# EAGLE board breakout1 (EAGLE 6.6.0)
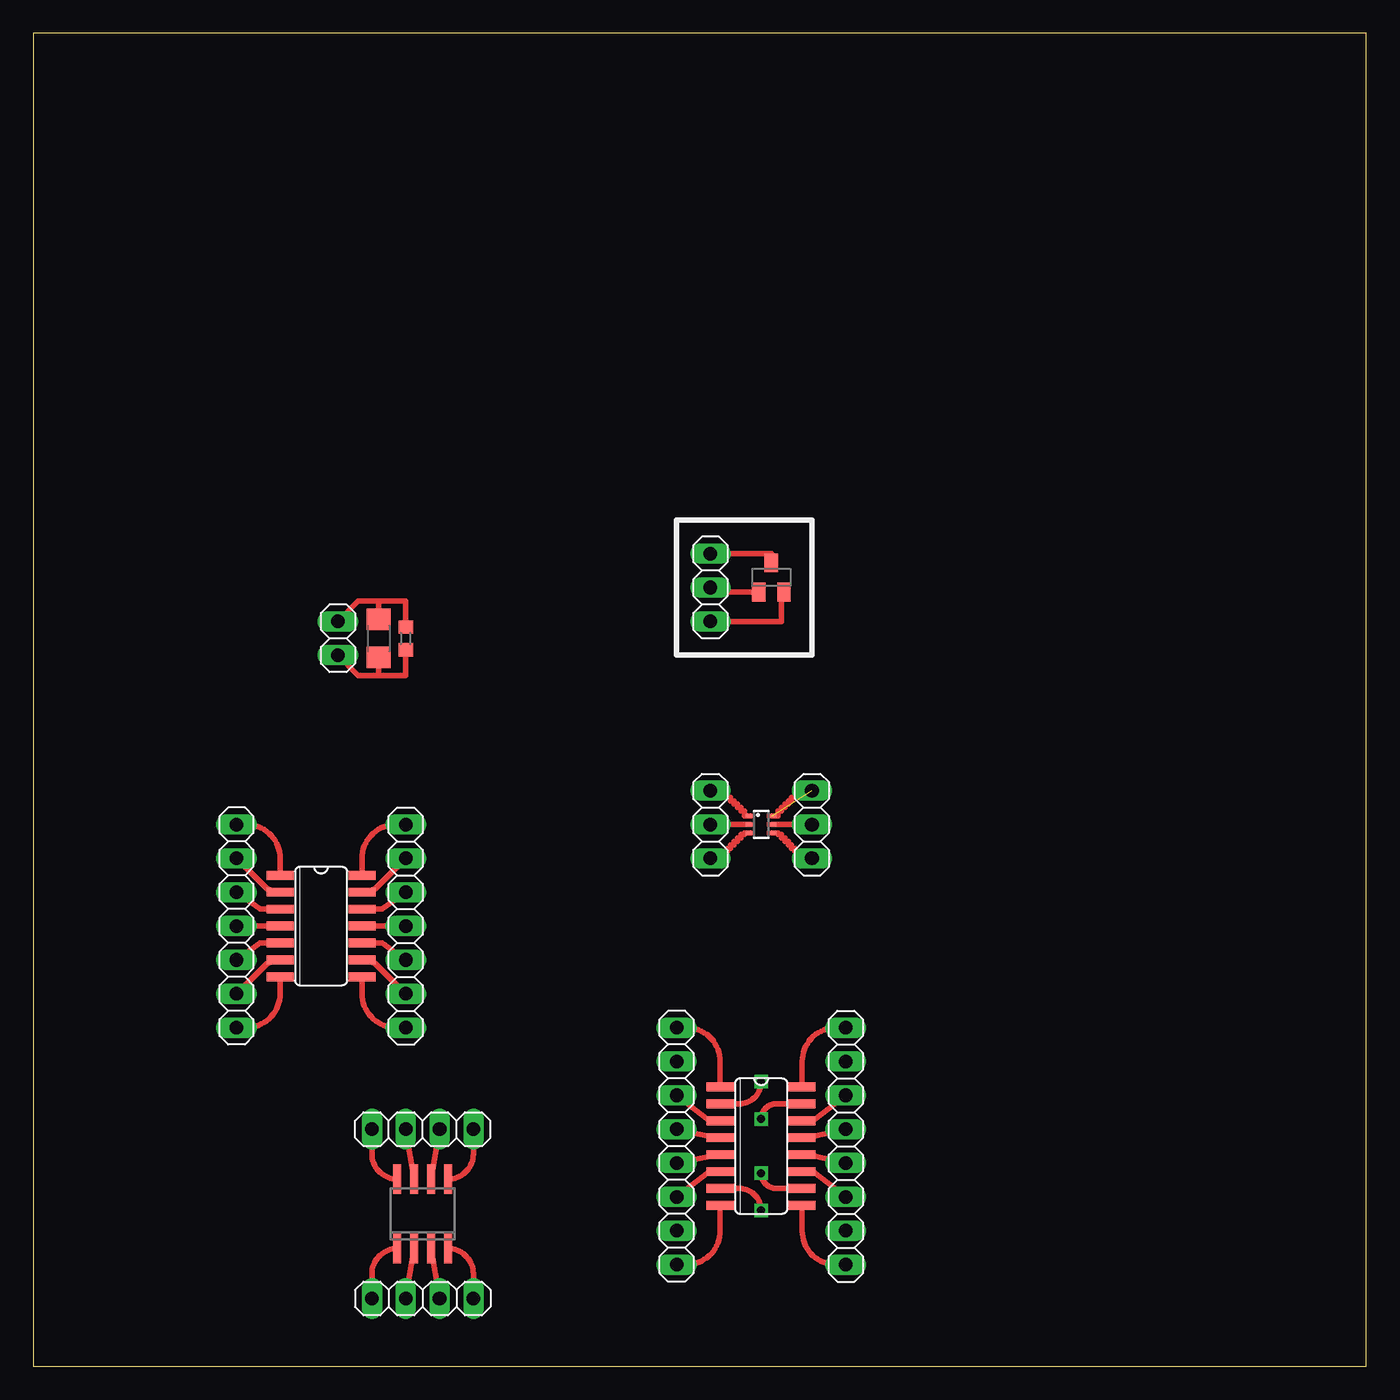
[diagram p0: board, top side]
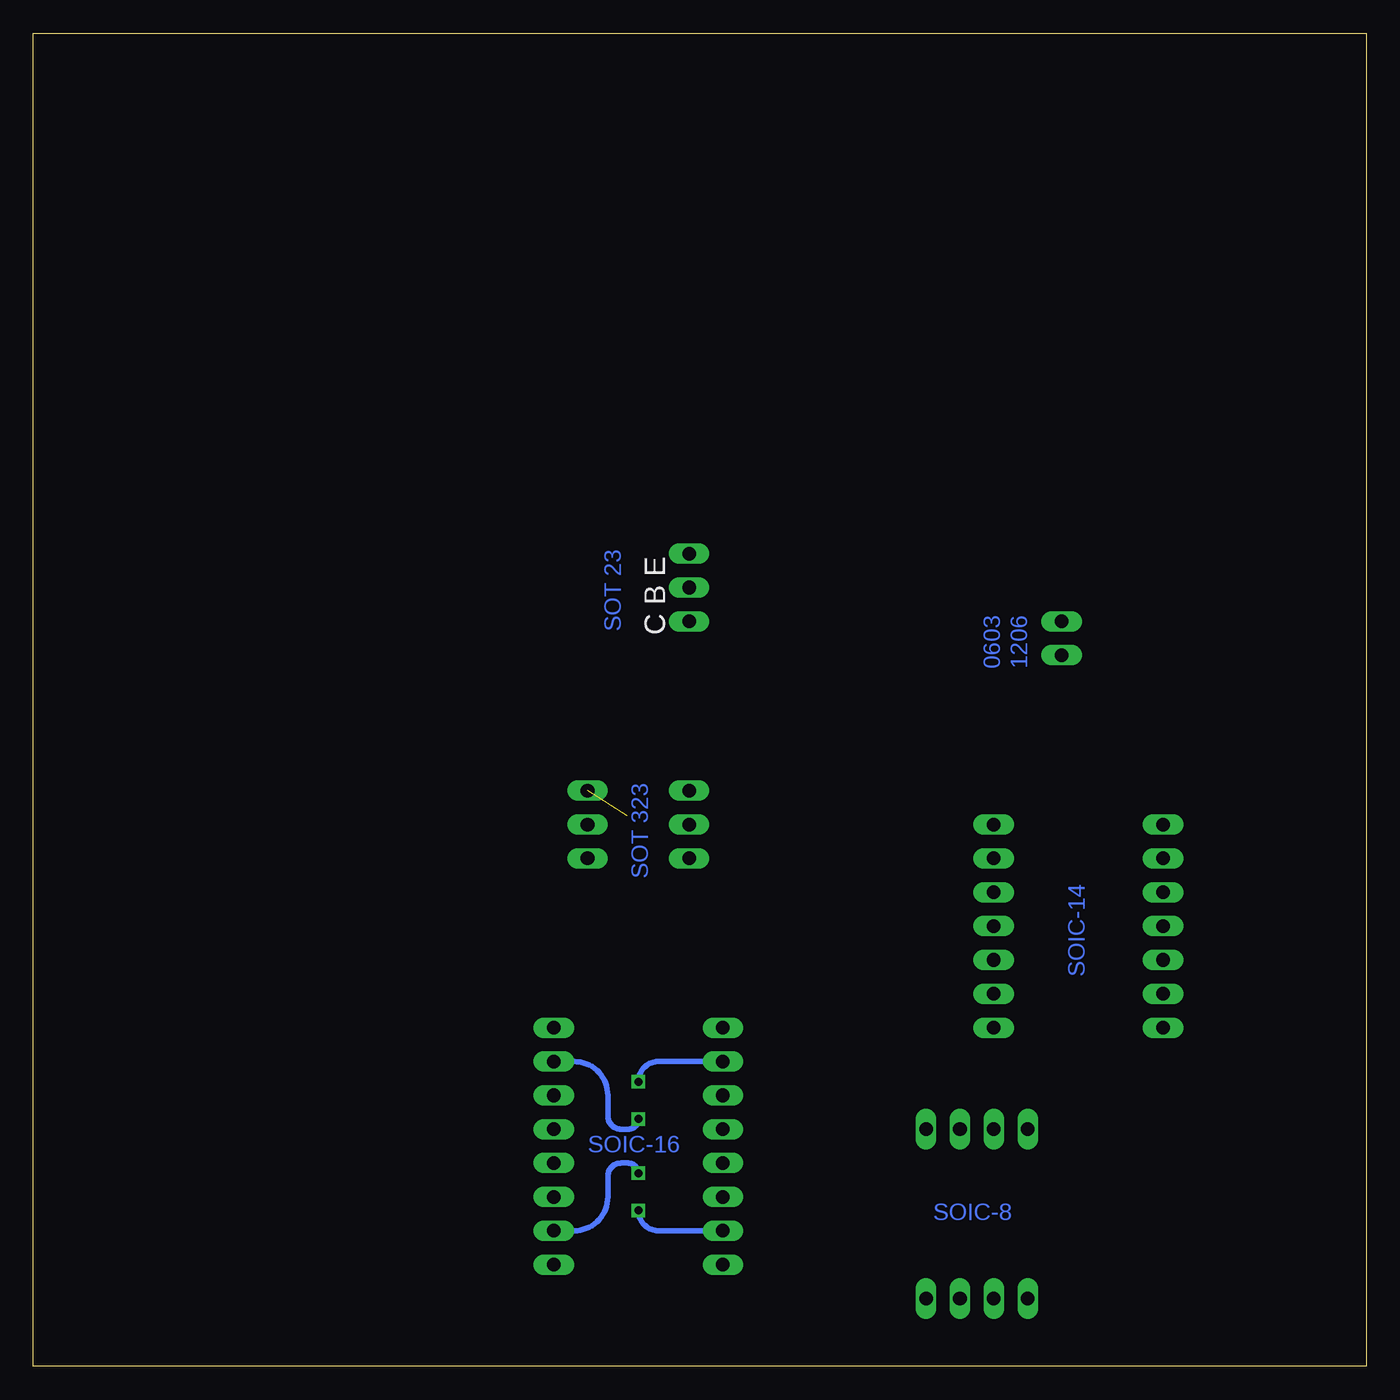
[diagram p1: board, bottom side, seen from below]

Size 100 x 100 mm. Coordinates in mm from the lower left corner, seen from the top.
Outline: 0,0 100,0 100,100 0,100 0,0
Copper layers (1*16): Top 0.035mm / dielectric 1.5mm / Bottom 0.035mm
Design rules "default": minimum track width 10mil, minimum drill 24mil, track to track 8mil, track to pad 8mil, pad to pad 8mil, via to via 8mil, smd to smd 8mil, copper to edge 40mil, drill to drill 8mil, minimum pad ring 10mil, minimum via ring 8mil, stop-mask expansion 4mil, vias tented up to drill 0mil, thermal gap 10mil

## Footprints (pad centres in the part's own frame; a part is rotated, then mirrored left to right if it is on the bottom)
SO16 = smd 0.66 x 2.032: 1 -4.445,-3.073; 2 -3.175,-3.073; 3 -1.905,-3.073; 4 -0.635,-3.073; 5 0.635,-3.073; 6 1.905,-3.073; 7 3.175,-3.073; 8 4.445,-3.073; 9 4.445,3.073; 10 3.175,3.073; 11 1.905,3.073; 12 0.635,3.073; 13 -0.635,3.073; 14 -1.905,3.073; 15 -3.175,3.073; 16 -4.445,3.073
SO14 = smd 0.66 x 2.032: 1 -3.81,-3.073; 2 -2.54,-3.073; 3 -1.27,-3.073; 4 0,-3.073; 5 1.27,-3.073; 6 2.54,-3.073; 7 3.81,-3.073; 8 3.81,3.073; 9 2.54,3.073; 10 1.27,3.073; 11 0,3.073; 12 -1.27,3.073; 13 -2.54,3.073; 14 -3.81,3.073
SO08 = smd 0.6 x 2.2: 1 -1.905,-2.6; 2 -0.635,-2.6; 3 0.635,-2.6; 4 1.905,-2.6; 5 1.905,2.6; 6 0.635,2.6; 7 -0.635,2.6; 8 -1.905,2.6
1X03 = drill 1.016 long: 1 -2.54,0; 2 0,0; 3 2.54,0
1X02 = drill 1.016 long: 1 -1.27,0; 2 1.27,0
1X08 = drill 1.016 long: 1 -8.89,0; 2 -6.35,0; 3 -3.81,0; 4 -1.27,0; 5 1.27,0; 6 3.81,0; 7 6.35,0; 8 8.89,0
1X07 = drill 1.016 long: 1 -7.62,0; 2 -5.08,0; 3 -2.54,0; 4 0,0; 5 2.54,0; 6 5.08,0; 7 7.62,0
1X04 = drill 1.016 long: 1 -3.81,0; 2 -1.27,0; 3 1.27,0; 4 3.81,0
SOT23 = smd 1 x 1.4: 1 -0.95,-1.1; 2 0.95,-1.1; 3 0,1.1
R0603 = smd 1 x 1.1: 1 -0.85,0; 2 0.85,0
R1206 = smd 1.6 x 1.803: 1 -1.422,0; 2 1.422,0
SOT363 = smd 0.3 x 0.7: 1 -0.65,-0.8; 2 0,-0.8; 3 0.65,-0.8; 4 0.65,0.8; 5 0,0.8; 6 -0.65,0.8

## Placement (x,y rotation side)
IC1  74LS151D  [SO16]  54.61,16.51 270 top
IC2  74LS03D  [SO14]  21.59,33.02 270 top
IC3  NE555D  [SO08]  29.21,11.43 0 top
JP1  [1X03]  50.8,40.64 90 top
JP2  [1X03]  58.42,40.64 90 top
JP3  [1X03]  50.8,58.42 270 top
JP4  [1X02]  22.86,54.61 270 top
JP5  [1X08]  60.96,16.51 90 top
JP6  [1X08]  48.26,16.51 270 top
JP7  [1X07]  15.24,33.02 270 top
JP8  [1X07]  27.94,33.02 90 top
JP9  [1X04]  29.21,5.08 0 top
JP10  [1X04]  29.21,17.78 180 top
Q1  BCX70SMD  [SOT23]  55.37,59.18 0 top
R2  [R0603]  27.94,54.61 90 top
R4  [R1206]  25.91,54.61 90 top
U$1  DMMT3904W  [SOT363]  54.61,40.64 270 top

## Library data of the parts
IC1 IC2 = 74xx-us
IC3 = linear
JP1-JP10 = pinhead
Q1 = transistor-npn
R2 R4 = rcl
U$1 = !synth_sch

## Nets
N$1: JP1.3 U$1.1
N$2: JP1.2 U$1.2
N$3: JP1.1 U$1.3
N$4: JP2.1 U$1.4
N$5: JP2.2 U$1.5
N$6: JP2.3 U$1.6
N$8: JP3.2 Q1.1
N$10: JP3.3 Q1.2
N$11: JP4.1 R2.2 R4.2
N$12: JP4.2 R2.1 R4.1
N$13: IC1.1 JP6.1
N$14: IC1.2 JP6.2
N$15: IC1.3 JP6.3
N$16: IC1.4 JP6.4
N$17: IC1.7 JP6.7
N$18: IC1.5 JP6.5
N$19: IC1.6 JP6.6
N$20: IC1.8 JP6.8
N$21: IC1.9 JP5.1
N$22: IC1.10 JP5.2
N$23: IC1.11 JP5.3
N$24: IC1.12 JP5.4
N$25: IC1.13 JP5.5
N$26: IC1.14 JP5.6
N$27: IC1.15 JP5.7
N$28: IC1.16 JP5.8
N$29: IC2.1 JP7.1
N$31: IC2.2 JP7.2
N$32: IC2.4 JP7.4
N$33: IC2.5 JP7.5
N$34: IC2.6 JP7.6
N$35: IC2.3 JP7.3
N$36: IC2.8 JP8.1
N$37: IC2.9 JP8.2
N$38: IC2.10 JP8.3
N$39: IC2.11 JP8.4
N$40: IC2.12 JP8.5
N$41: IC2.13 JP8.6
N$42: IC2.14 JP8.7
N$43: IC2.7 JP7.7
N$44: IC3.1 JP9.1
N$45: IC3.2 JP9.2
N$46: IC3.4 JP9.4
N$47: IC3.3 JP9.3
N$48: IC3.5 JP10.1
N$49: IC3.6 JP10.2
N$50: IC3.7 JP10.3
N$51: IC3.8 JP10.4
N$53: JP3.1 Q1.3

## Tracks (layer width: path | path; a pad name or v marks a point on that pad's centre or on a via)
N$1
  Top 0.406: U$1.1 53.34,41.29 53.34,41.66 53.09,41.66 53.09,41.91 52.83,41.91 52.83,42.16 52.58,42.16 52.58,42.42 52.32,42.42 52.32,42.67 52.07,42.67 52.07,42.93 51.82,42.93 51.82,43.18 JP1.3
N$2
  Top 0.406: U$1.2 JP1.2
N$3
  Top 0.406: U$1.3 53.34,39.99 53.34,39.88 53.09,39.88 53.09,39.62 52.83,39.62 52.83,39.37 52.58,39.37 52.58,39.12 52.32,39.12 52.32,38.86 52.07,38.86 52.07,38.61 51.82,38.61 | 51.56,38.61 51.82,38.61 | 51.82,38.61 51.82,38.35 51.56,38.35 51.56,38.1 JP1.1
N$4
  Top 0.406: U$1.4 55.88,39.99 55.88,39.88 56.13,39.88 56.13,39.62 56.39,39.62 56.39,39.37 56.64,39.37 56.64,39.12 56.9,39.12 56.9,38.86 57.15,38.86 57.15,38.61 57.4,38.61 57.4,38.35 57.66,38.35 57.66,38.1 JP2.1
N$5
  Top 0.406: U$1.5 JP2.2
N$6  (1 unrouted)
N$7
  Top 0.406: 55.41,41.29 55.88,41.29 55.88,41.66 56.13,41.66 56.13,41.91 56.39,41.91 56.39,42.16 56.64,42.16 56.64,42.42 56.9,42.42 56.9,42.67 57.15,42.67 57.15,42.93 57.4,42.93 57.4,43.18 58.42,43.18
N$8
  Top 0.406: Q1.1 50.8,58.08 JP3.2
N$10
  Top 0.406: Q1.2 56.13,58.08 56.13,55.88 JP3.3
N$11
  Top 0.406: R2.2 27.94,57.4 25.91,57.4 | R4.2 25.91,57.4 | 25.91,57.4 24.38,57.4 JP4.1
N$12
  Top 0.406: R2.1 27.94,51.82 25.91,51.82 | R4.1 25.91,51.82 | 25.91,51.82 24.38,51.82 JP4.2
N$13
  Top 0.406: IC1.1 51.54,22.86 arc90 49,25.4 JP6.1
N$14  (via drill 0.6)
  Top 0.406: IC1.2 52.96,19.68 arc90 v54.61,21.34
  Bottom 0.406: v54.61,21.34 arc90 53.09,22.86 JP6.2
N$15
  Top 0.406: JP6.3 50.55,18.54 IC1.3
N$16
  Top 0.406: JP6.4 50.55,17.27 IC1.4
N$17  (via drill 0.6)
  Top 0.406: IC1.7 52.96,13.34 arc-90 v54.61,11.68
  Bottom 0.406: v54.61,11.68 arc-90 53.09,10.16 JP6.7
N$18
  Top 0.406: JP6.5 50.8,15.75 IC1.5
N$19
  Top 0.406: JP6.6 50.55,14.48 IC1.6
N$20
  Top 0.406: IC1.8 51.54,10.16 arc-90 49,7.62 JP6.8
N$21
  Top 0.406: IC1.9 57.68,10.16 arc90 60.22,7.62 JP5.1
N$22  (via drill 0.6)
  Top 0.406: IC1.10 55.75,13.34 arc-90 v54.61,14.48
  Bottom 0.406: v54.61,14.48 arc-90 55.37,15.24 55.88,15.24 arc-90 56.9,14.22 56.9,12.7 arc90 59.44,10.16 JP5.2
N$23
  Top 0.406: JP5.3 58.67,14.48 IC1.11
N$24
  Top 0.406: JP5.4 58.67,15.75 IC1.12
N$25
  Top 0.406: JP5.5 58.67,17.27 IC1.13
N$26
  Top 0.406: JP5.6 58.67,18.54 IC1.14
N$27  (via drill 0.6)
  Top 0.406: IC1.15 55.75,19.68 arc90 v54.61,18.54
  Bottom 0.406: v54.61,18.54 arc90 55.37,17.78 55.88,17.78 arc90 56.9,18.8 56.9,20.32 arc-90 59.44,22.86 JP5.7
N$28
  Top 0.406: IC1.16 57.68,22.86 arc-90 60.22,25.4 JP5.8
N$29
  Top 0.406: IC2.1 18.52,38.1 arc90 15.98,40.64 JP7.1
N$31
  Top 0.406: IC2.2 17.53,35.81 JP7.2
N$32
  Top 0.406: IC2.4 JP7.4
N$33
  Top 0.406: IC2.5 17.02,31.75 JP7.5
N$34
  Top 0.406: IC2.6 17.53,30.23 JP7.6
N$35
  Top 0.406: IC2.3 17.02,34.29 JP7.3
N$36
  Top 0.406: IC2.8 24.66,27.94 arc90 27.2,25.4 JP8.1
N$37
  Top 0.406: IC2.9 25.65,30.23 JP8.2
N$38
  Top 0.406: IC2.10 26.16,31.75 JP8.3
N$39
  Top 0.406: IC2.11 JP8.4
N$40
  Top 0.406: IC2.12 26.16,34.29 JP8.5
N$41
  Top 0.406: IC2.13 25.65,35.81 JP8.6
N$42
  Top 0.406: IC2.14 24.66,38.1 arc-90 27.2,40.64 JP8.7
N$43
  Top 0.406: IC2.7 18.52,27.94 arc-90 15.98,25.4 JP7.7
N$44
  Top 0.406: IC3.1 arc90 25.4,6.92 JP9.1
N$45
  Top 0.406: IC3.2 JP9.2
N$46
  Top 0.406: IC3.4 arc-90 33.02,6.92 JP9.4
N$47
  Top 0.406: IC3.3 JP9.3
N$48
  Top 0.406: IC3.5 arc90 33.02,15.94 JP10.1
N$49
  Top 0.406: IC3.6 JP10.2
N$50
  Top 0.406: IC3.7 JP10.3
N$51
  Top 0.406: IC3.8 arc-90 25.4,15.94 JP10.4
N$53
  Top 0.406: Q1.3 55.37,60.96 JP3.1

## Text on the board
Bottom: SOT 23 | 1206 | 0603 | SOT 323 | SOIC-14 | SOIC-16 | SOIC-8
bNames: C B E